# EAGLE board CT_schematic (EAGLE 7.6.0)

Size 100 x 80 mm. Coordinates in mm from the lower left corner, seen from the top.
Outline: 0,0 100,0 100,80 0,80 0,0
Copper layers (1*16): Top 0.035mm / dielectric 1.5mm / Bottom 0.035mm
Design rules "default": minimum track width 10mil, minimum drill 24mil, track to track 8mil, track to pad 8mil, pad to pad 8mil, via to via 8mil, smd to smd 8mil, copper to edge 40mil, drill to drill 8mil, minimum pad ring 10mil, minimum via ring 8mil, stop-mask expansion 4mil, vias tented up to drill 0mil, thermal gap 10mil

## Footprints (pad centres in the part's own frame; a part is rotated, then mirrored left to right if it is on the bottom)
C0603 = smd 0.8 x 0.8: 1 -0.762,0; 2 0.762,0
C0402 = smd 0.5 x 0.5: 1 -0.508,0; 2 0.508,0
C0805 = smd 1.2 x 1.3: 1 -1.016,0; 2 1.016,0
C1206 = smd 1.3 x 1.6: 1 -1.524,0; 2 1.524,0
L0603 = smd 0.8 x 0.8: 1 -0.762,0; 2 0.762,0
WE-HCI_7030/7040/7050 = smd 2.5 x 3: 1 -2.45,0; 2 2.45,0
R0603 = smd 0.8 x 0.8: 1 -0.762,0; 2 0.762,0
UFQFPN48 = smd 0.559 x 0.305: 1 -3.375,2.751; 2 -3.375,2.251; 3 -3.375,1.75; 4 -3.375,1.25; 5 -3.375,0.75; 6 -3.375,0.25; 7 -3.375,-0.25; 8 -3.375,-0.75; 9 -3.375,-1.25; 10 -3.375,-1.75; 11 -3.375,-2.251; 12 -3.375,-2.751; 25 3.375,-2.751; 26 3.375,-2.251; 27 3.375,-1.75; 28 3.375,-1.25; 29 3.375,-0.75; 30 3.375,-0.25; 31 3.375,0.25; 32 3.375,0.75; 33 3.375,1.25; 34 3.375,1.75; 35 3.375,2.251; 36 3.375,2.751 | smd 0.305 x 0.559: 13 -2.751,-3.375; 14 -2.251,-3.375; 15 -1.75,-3.375; 16 -1.25,-3.375; 17 -0.75,-3.375; 18 -0.25,-3.375; 19 0.25,-3.375; 20 0.75,-3.375; 21 1.25,-3.375; 22 1.75,-3.375; 23 2.251,-3.375; 24 2.751,-3.375; 37 2.751,3.375; 38 2.251,3.375; 39 1.75,3.375; 40 1.25,3.375; 41 0.75,3.375; 42 0.25,3.375; 43 -0.25,3.375; 44 -0.75,3.375; 45 -1.25,3.375; 46 -1.75,3.375; 47 -2.251,3.375; 48 -2.751,3.375 | smd 5.588 x 5.588: 49 0,0
QFN-32 = smd 0.6 x 0.3: 1 -2.3,1.75; 2 -2.3,1.25; 3 -2.3,0.75; 4 -2.3,0.25; 5 -2.3,-0.25; 6 -2.3,-0.75; 7 -2.3,-1.25; 8 -2.3,-1.75; 17 2.3,-1.75; 18 2.3,-1.25; 19 2.3,-0.75; 20 2.3,-0.25; 21 2.3,0.25; 22 2.3,0.75; 23 2.3,1.25; 24 2.3,1.75 | smd 0.3 x 0.6: 9 -1.75,-2.3; 10 -1.25,-2.3; 11 -0.75,-2.3; 12 -0.25,-2.3; 13 0.25,-2.3; 14 0.75,-2.3; 15 1.25,-2.3; 16 1.75,-2.3; 25 1.75,2.3; 26 1.25,2.3; 27 0.75,2.3; 28 0.25,2.3; 29 -0.25,2.3; 30 -0.75,2.3; 31 -1.25,2.3; 32 -1.75,2.3 | smd 3.2 x 3.2: EXP 0,0
SJ-43515TS-SMT-TR = smd 2.2 x 3: 1 0.6,-7.4; 4 3.4,-7.4 | smd 3 x 3: 2 12.8,-7.4; 5 17,-3 | smd 2 x 3: 3 5.3,0; 6 2.5,0 | drill 1.8: P$7 4.5,-3.69; P$8 11.54,-3.69
WM-64PC = drill 0.6 pad 1: 1 -1,0.95; 2 -1,-0.95
XB24CZ7UIS-004 = smd 2.84 x 1.52: 1 -10,6; 2 -10,4; 3 -10,2; 4 -10,0; 5 -10,-2; 6 -10,-4; 7 -10,-6; 8 -10,-8; 9 -10,-10; 10 -10,-12; 11 -10,-14; 12 -10,-16; 13 -10,-18; 21 10,-18; 22 10,-16; 23 10,-14; 24 10,-12; 25 10,-10; 26 10,-8; 27 10,-6; 28 10,-4; 29 10,-2; 30 10,0; 31 10,2; 32 10,4; 33 10,6; 34 10,8; 35 10,10; 36 10,12; 37 10,14 | smd 1.52 x 2.84: 14 -6,-19.68; 15 -4,-19.68; 16 -2,-19.68; 17 0,-19.68; 18 2,-19.68; 19 4,-19.68; 20 6,-19.68
ABLS-25.000MHZ-B2F-T = smd 5.6 x 2.8: 1 -3.81,0; 2 5.69,0
ASEK = smd 1.4 x 1: 1 -1.1,-0.8; 2 1.1,-0.8; 3 1.1,0.8; 4 -1.1,0.8
ASFL1 = smd 1.7 x 1.5: 1 -1.27,-1.1; 2 1.27,-1.1; 3 1.27,1.1; 4 -1.27,1.1
WSON-8 = smd 0.3 x 0.6: 1 -0.75,0; 2 0.05,0; 3 0.85,0; 4 1.65,0; 5 1.65,3.8; 6 0.85,3.8; 7 0.05,3.8; 8 -0.75,3.8 | smd 3 x 2.6: PAD 0.45,1.9
TSOT-23-5 = smd 1.3 x 0.62: 1 -1.31,0.95; 2 -1.31,0; 3 -1.31,-0.95; 4 1.31,-0.95; 5 1.31,0.95
DFN8_2X3MC = smd 0.813 x 0.305: 1 -1.398,0.75; 2 -1.398,0.25; 3 -1.398,-0.25; 4 -1.398,-0.75; 5 1.398,-0.75; 6 1.398,-0.25; 7 1.398,0.25; 8 1.398,0.75 | smd 1.753 x 1.549: 9 0,0
JST-2-SMD = smd 1 x 4.6: 1 -1,-3.7; 2 1,-3.7 | smd 1.6 x 3.4: NC1 -3.4,1.5; NC2 3.4,1.5
FCI_10118193-0001LF = smd 0.4 x 1.35: 1 -1.3,2.675; 2 -0.65,2.675; 3 0,2.675; 4 0.65,2.675; 5 1.3,2.675 | smd 1.6 x 1.4: 6 -3.2,2.45; 7 3.2,2.45 | smd 1.9 x 1.9: 8 -1.2,0; 9 1.2,0 | hole 0.5: -3.3,0; 3.3,0
SON-6 = smd 0.55 x 0.3: 1 -0.355,0.5 | smd 0.52 x 0.3: 2 -0.37,0; 3 -0.37,-0.5; 4 0.37,-0.5; 5 0.37,0; 6 0.37,0.5
SW_4-1437565-2 = smd 1.4 x 2.1: 1 -2.23,4.55; 2 -2.23,-4.55; 3 2.23,4.55; 4 2.23,-4.55
LGM67K-G1J2-24-Z = smd 0.8 x 1.4: A -2,0; C 0,0
NC7SZ125M5X = smd 1.3 x 0.7: 1 -1.3,0.95; 2 -1.3,0; 3 -1.3,-0.95; 4 1.3,-0.95; 5 1.3,0.95
DUMMY_PACKAGE_166 = drill 0.3: 1 0,-1; 2 1.5,-1; 3 3,-1

## Placement (x,y rotation side)
C1  1e-06  [C0603]  -45.72,92.71 0 top  (outside the outline)
C2  1e-07  [C0603]  -49.53,92.71 0 top  (outside the outline)
C3  1e-07  [C0603]  -53.34,92.71 0 top  (outside the outline)
C4  1e-07  [C0603]  -57.15,92.71 0 top  (outside the outline)
C5  1e-07  [C0603]  -60.96,92.71 0 top  (outside the outline)
C6  1e-07  [C0603]  -64.77,92.71 0 top  (outside the outline)
C7  4.7e-06  [C0603]  -34.29,92.71 0 top  (outside the outline)
C8  2.2e-06  [C0603]  -38.1,92.71 0 top  (outside the outline)
C9  1e-08  [C0603]  -68.58,92.71 0 top  (outside the outline)
C10  1e-06  [C0603]  -72.39,92.71 0 top  (outside the outline)
C11  1e-11  [C0402]  -81.28,97.79 0 top  (outside the outline)
C12  1e-11  [C0402]  -15.24,102.87 0 top  (outside the outline)
C13  1e-06  [C0603]  -76.2,92.71 0 top  (outside the outline)
C14  1e-06  [C0603]  -80.01,92.71 0 top  (outside the outline)
C15  1e-06  [C0603]  -83.82,92.71 0 top  (outside the outline)
C16  1e-06  [C0603]  -15.24,97.79 0 top  (outside the outline)
C17  1e-06  [C0603]  -19.05,97.79 0 top  (outside the outline)
C18  1e-06  [C0603]  -22.86,97.79 0 top  (outside the outline)
C19  1e-06  [C0603]  -26.67,97.79 0 top  (outside the outline)
C20  1e-07  [C0402]  -19.05,102.87 0 top  (outside the outline)
C21  1e-07  [C0402]  -22.86,102.87 0 top  (outside the outline)
C22  1e-07  [C0402]  -26.67,102.87 0 top  (outside the outline)
C23  1e-07  [C0402]  -30.48,102.87 0 top  (outside the outline)
C24  1e-06  [C0603]  -30.48,97.79 0 top  (outside the outline)
C25  1e-05  [C0805]  -21.59,86.36 0 top  (outside the outline)
C26  1e-07  [C0402]  -34.29,102.87 0 top  (outside the outline)
C27  4.7e-11  [C0402]  -77.47,97.79 0 top  (outside the outline)
C28  8.2e-12  [C0603]  -41.91,92.71 0 top  (outside the outline)
C29  1e-08  [C0402]  -38.1,102.87 0 top  (outside the outline)
C30  1e-08  [C0402]  -41.91,102.87 0 top  (outside the outline)
C31  1e-08  [C0402]  -45.72,102.87 0 top  (outside the outline)
C32  1e-05  [C0805]  -26.67,86.36 0 top  (outside the outline)
C33  1e-05  [C0805]  -31.75,86.36 0 top  (outside the outline)
C34  1e-05  [C0805]  -36.83,86.36 0 top  (outside the outline)
C35  1e-05  [C0805]  -41.91,86.36 0 top  (outside the outline)
C36  1e-07  [C0402]  -49.53,102.87 0 top  (outside the outline)
C37  1e-05  [C1206]  -68.58,80.01 0 top  (outside the outline)
C38  1e-05  [C1206]  -74.93,80.01 0 top  (outside the outline)
C39  1e-08  [C0402]  -53.34,102.87 0 top  (outside the outline)
C40  1e-08  [C0402]  -57.15,102.87 0 top  (outside the outline)
F1  240.0  [L0603]  -34.29,97.79 0 top  (outside the outline)
I1  2e-06  [WE-HCI_7030/7040/7050]  -73.66,45.72 0 top  (outside the outline)
R1  10000.0  [R0603]  -80.01,86.36 0 top  (outside the outline)
R2  1000.0  [R0603]  -38.1,97.79 0 top  (outside the outline)
R3  1600.5  [R0603]  -41.91,97.79 0 top  (outside the outline)
R4  4700.0  [R0603]  -45.72,97.79 0 top  (outside the outline)
R5  4700.0  [R0603]  -49.53,97.79 0 top  (outside the outline)
R6  10000.0  [R0603]  -15.24,92.71 0 top  (outside the outline)
R7  1270.0  [R0603]  -53.34,97.79 0 top  (outside the outline)
R8  1270.0  [R0603]  -57.15,97.79 0 top  (outside the outline)
R9  100000.0  [R0603]  -59.69,86.36 0 top  (outside the outline)
R10  200.0  [R0603]  -60.96,97.79 0 top  (outside the outline)
R11  1000.0  [R0603]  -64.77,97.79 0 top  (outside the outline)
R12  220000.0  [R0603]  -64.77,86.36 0 top  (outside the outline)
R13  1000000.0  [R0603]  -54.61,86.36 0 top  (outside the outline)
R14  10000.0  [R0603]  -20.32,92.71 0 top  (outside the outline)
R15  10000.0  [R0603]  -25.4,92.71 0 top  (outside the outline)
R16  9100.0  [R0603]  -68.58,97.79 0 top  (outside the outline)
R17  680000.0  [R0603]  -69.85,86.36 0 top  (outside the outline)
R18  120000.0  [R0603]  -74.93,86.36 0 top  (outside the outline)
R19  2000.0  [R0603]  -72.39,97.79 0 top  (outside the outline)
R20  10000.0  [R0603]  -30.48,92.71 0 top  (outside the outline)
U1  STM32F410C8U6  [UFQFPN48]  -38.1,71.12 0 top  (outside the outline)
U2  SGTL5000XNAA3  [QFN-32]  -68.58,59.69 0 top  (outside the outline)
U3  SJ-43515TS-SMT-TR  [SJ-43515TS-SMT-TR]  -64.77,10.16 0 top  (outside the outline)
U4  SJ-43515TS-SMT-TR  [SJ-43515TS-SMT-TR]  -39.37,49.53 0 top  (outside the outline)
U5  SJ-43515TS-SMT-TR  [SJ-43515TS-SMT-TR]  -67.31,49.53 0 top  (outside the outline)
U6  WM-64PCT  [WM-64PC]  -54.61,59.69 0 top  (outside the outline)
U7  XB24CZ7UIS-004  [XB24CZ7UIS-004]  -25.4,21.59 0 top  (outside the outline)
U8  ABLS-25.000MHZ-B2F-T  [ABLS-25.000MHZ-B2F-T]  -45.72,80.01 0 top  (outside the outline)
U9  ASEK-32.768KHz-ECST  [ASEK]  -29.21,80.01 0 top  (outside the outline)
U10  ASFL-24.57MHZ-NCS  [ASFL1]  -58.42,71.12 0 top  (outside the outline)
U11  LP3878SDX-ADJ/NOPB  [WSON-8]  -30.48,69.85 0 top  (outside the outline)
U12  ltc3406es5  [TSOT-23-5]  -46.99,86.36 0 top  (outside the outline)
U13  MCP73831T-2ACI/MC  [DFN8_2X3MC]  -72.39,101.6 0 top  (outside the outline)
U14  S2B-PH-SM4-TB(LF)(SN)  [JST-2-SMD]  -41.91,60.96 0 top  (outside the outline)
U15  10118193-0001LF  [FCI_10118193-0001LF]  -67.31,71.12 0 top  (outside the outline)
U16  TPS3895ADRYR  [SON-6]  -66.04,101.6 0 top  (outside the outline)
U17  4-1437565-2  [SW_4-1437565-2]  -27.94,60.96 0 top  (outside the outline)
U18  Q65110A2395  [LGM67K-G1J2-24-Z]  -57.15,80.01 0 top  (outside the outline)
U19  nc7sz125m5x  [NC7SZ125M5X]  -80.01,78.74 0 top  (outside the outline)
U20  nc7sz125m5x  [NC7SZ125M5X]  -15.24,86.36 0 top  (outside the outline)
U21  Dummy  [DUMMY_PACKAGE_166]  -63.5,102.87 0 top  (outside the outline)

## Library data of the parts
C1-C40 F1 I1 R1-R20 U1-U21 = circuit_tree

## Nets
CLK_CRYSTAL_U1_5: C11.1 U1.5 U8.1
CLK_CRYSTAL_U1_6: C12.1 U1.6 U8.2
CLK_U1_3: U1.3 U9.3
CLK_U2_21: U2.21 U10.3
GND: C1.2 C2.2 C3.2 C4.2 C5.2 C6.2 C7.2 C8.2 C9.2 C10.2 C11.2 C12.2 C20.2 C21.2 C22.2 C23.2 C24.2 C25.2 C26.2 C27.2 C28.2 C29.2 C30.2 C31.2 C32.2 C33.2 C34.2 C35.1 C35.2 C36.2 C37.2 C38.2 C39.2 C40.2 R2.2 R6.2 R8.2 R11.2 R12.2 R16.2 R18.2 R19.2 U1.8 U1.23 U1.35 U1.47 U1.49 U2.1 U2.3 U2.7 U2.EXP U4.1 U5.1 U6.2 U7.1 U7.11 U7.13 U7.22 U7.35 U9.2 U10.2 U11.3 U11.PAD U12.2 U13.6 U13.9 U14.2 U15.5 U15.6 U15.7 U15.8 U15.9 U16.2 U18.C U19.1 U19.3 U20.1 U20.3 U21.1
INPUT_USBPOWER_5V: C37.1 R20.2 U13.1 U13.2 U15.1
NET_U1_7: R5.1 U1.7 U20.4
NET_U1_9: C3.1 C9.1 C10.1 F1.1 U1.9
NET_U1_22: C8.1 U1.22
NET_U1_44: R6.1 U1.44
NET_U1_45: R3.1 U1.45 U18.A
NET_U1_46: R1.1 U1.46 U17.3 U17.4
NET_U2_10: C23.1 U2.10
NET_U2_29: R7.1 U2.29
NET_U2_31: R8.1 U2.31
NET_U3_1: U2.4 U3.1
NET_U3_2: U2.2 U3.2
NET_U3_5: U2.6 U3.5
NET_U4_2: C14.1 U4.2
NET_U4_5: C13.1 U4.5
NET_U4_11: C14.2
NET_U4_12: C13.2
NET_U5_2: C16.1 C17.1 U5.2
NET_U5_5: C15.1 U5.5
NET_U5_13: C16.2 C17.2
NET_U5_14: C15.2
NET_U6_1: C18.1 C19.1 C24.1 U2.16 U6.1
NET_U6_15: C18.2 C19.2
NET_U7_6: R4.1 U7.6 U19.4
NET_U11_1: C31.1 U11.1
NET_U11_6: R10.2 R11.1 U11.6
NET_U11_8: R9.1 U11.8
NET_U12_1: U12.1
NET_U12_3: I1.1 U12.3
NET_U12_5: R12.1 R13.1 U12.5
NET_U12_ATNET_3: I1.2 R13.2
NET_U13_5: R20.1 U13.5
NET_U13_8: R19.1 U13.8
NET_U16_1: R15.1 R16.1 U16.1
NET_U16_3: R17.2 R18.1 U16.3
NET_U16_4: R14.1 U16.4 U19.2 U20.2
NET_U17_1: R2.1 U17.1 U17.2
PROC_ADC1_IN1: U1.11 U21.3
PROC_ADC1_IN2: U1.12 U21.2
PROC_I2S1_CK: U1.15 U2.24
PROC_I2S1_SD: U1.17 U2.26
PROC_I2S1_WS: U1.14 U2.23
PROC_SPI1_MISO: U1.16 U7.17
PROC_SPI1_MOSI: U1.41 U7.16
PROC_SPI1_NSS: U1.38 U7.15
PROC_SPI1_SCK: U1.39 U7.14
VCC_S1_3V7: C32.1 C34.1 C38.1 R9.2 U11.4 U12.4 U13.3 U13.4 U14.1
VCC_TIER1_1V2: C20.1 C33.1 R10.1 U2.30 U11.5
VCC_TIER1_3V3: C1.1 C2.1 C4.1 C5.1 C6.1 C7.1 C21.1 C22.1 C25.1 C26.1 C27.1 C28.1 C29.1 C30.1 C35.2 C36.1 C39.1 C40.1 F1.2 I1.2 R1.2 R3.2 R4.2 R5.2 R7.2 R13.2 R14.2 R15.2 R17.1 U1.1 U1.24 U1.36 U1.48 U2.5 U2.20 U7.2 U7.27 U9.4 U10.4 U16.6 U19.5 U20.5

## Tracks (layer width: path | path; a pad name or v marks a point on that pad's centre or on a via)
CLK_CRYSTAL_U1_5  (2 unrouted)
CLK_CRYSTAL_U1_6  (2 unrouted)
CLK_U1_3  (1 unrouted)
CLK_U2_21  (1 unrouted)
GND  (78 unrouted)
INPUT_USBPOWER_5V  (4 unrouted)
NET_U1_7  (2 unrouted)
NET_U1_9  (4 unrouted)
NET_U1_22  (1 unrouted)
NET_U1_44  (1 unrouted)
NET_U1_45  (2 unrouted)
NET_U1_46  (3 unrouted)
NET_U2_10  (1 unrouted)
NET_U2_29  (1 unrouted)
NET_U2_31  (1 unrouted)
NET_U3_1  (1 unrouted)
NET_U3_2  (1 unrouted)
NET_U3_5  (1 unrouted)
NET_U4_2  (1 unrouted)
NET_U4_5  (1 unrouted)
NET_U5_2  (2 unrouted)
NET_U5_5  (1 unrouted)
NET_U5_13  (1 unrouted)
NET_U6_1  (4 unrouted)
NET_U6_15  (1 unrouted)
NET_U7_6  (2 unrouted)
NET_U11_1  (1 unrouted)
NET_U11_6  (2 unrouted)
NET_U11_8  (1 unrouted)
NET_U12_3  (1 unrouted)
NET_U12_5  (2 unrouted)
NET_U12_ATNET_3  (1 unrouted)
NET_U13_5  (1 unrouted)
NET_U13_8  (1 unrouted)
NET_U16_1  (2 unrouted)
NET_U16_3  (2 unrouted)
NET_U16_4  (3 unrouted)
NET_U17_1  (2 unrouted)
PROC_ADC1_IN1  (1 unrouted)
PROC_ADC1_IN2  (1 unrouted)
PROC_I2S1_CK  (1 unrouted)
PROC_I2S1_SD  (1 unrouted)
PROC_I2S1_WS  (1 unrouted)
PROC_SPI1_MISO  (1 unrouted)
PROC_SPI1_MOSI  (1 unrouted)
PROC_SPI1_NSS  (1 unrouted)
PROC_SPI1_SCK  (1 unrouted)
VCC_S1_3V7  (8 unrouted)
VCC_TIER1_1V2  (4 unrouted)
VCC_TIER1_3V3  (41 unrouted)